# Altium PCB Motor19thnov2020.PcbDoc
Units mm, origin at the board's own origin, x right, y up, seen from the top; angles counter-clockwise.
Board outline 53.59 x 39.37 mm, 2 copper layers (Top Layer, Bottom Layer); 15 components, 15 nets, 58 pads, 2 vias.
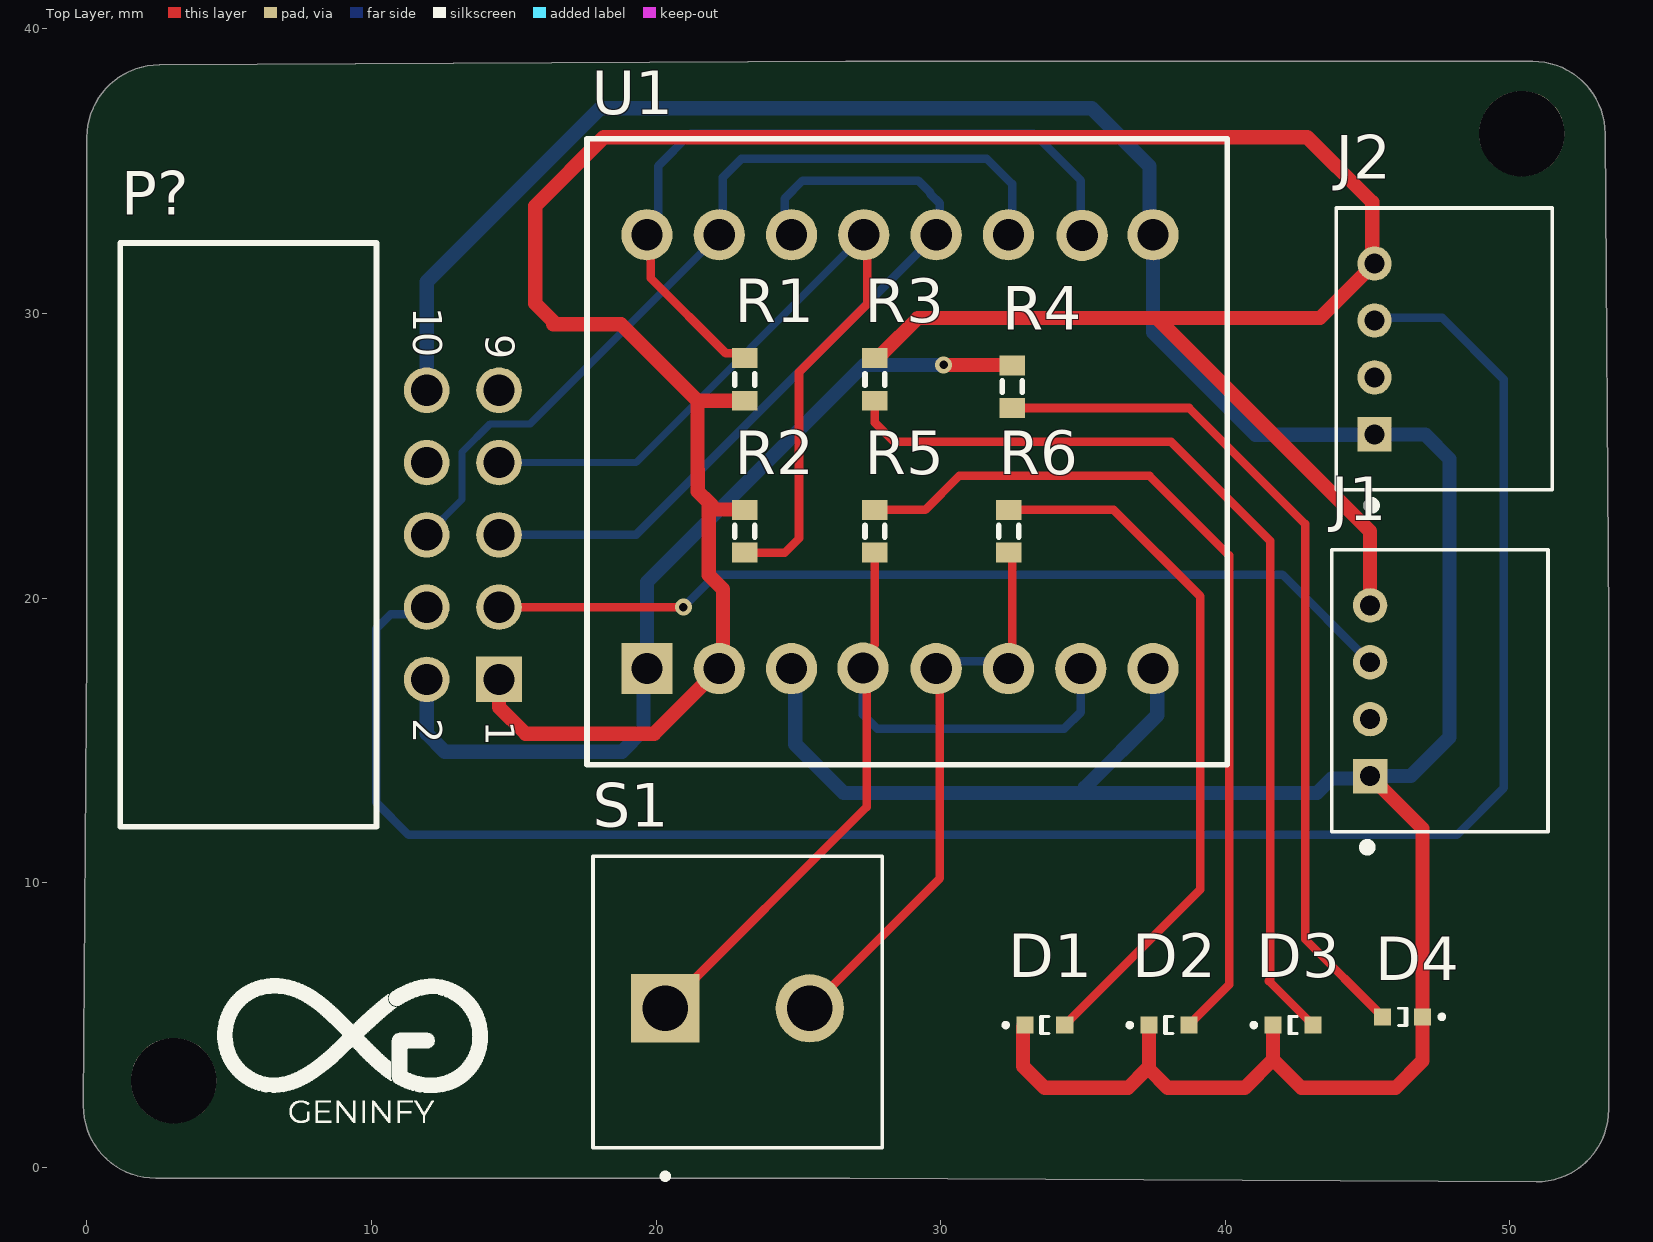
[diagram p0: Top Layer view]
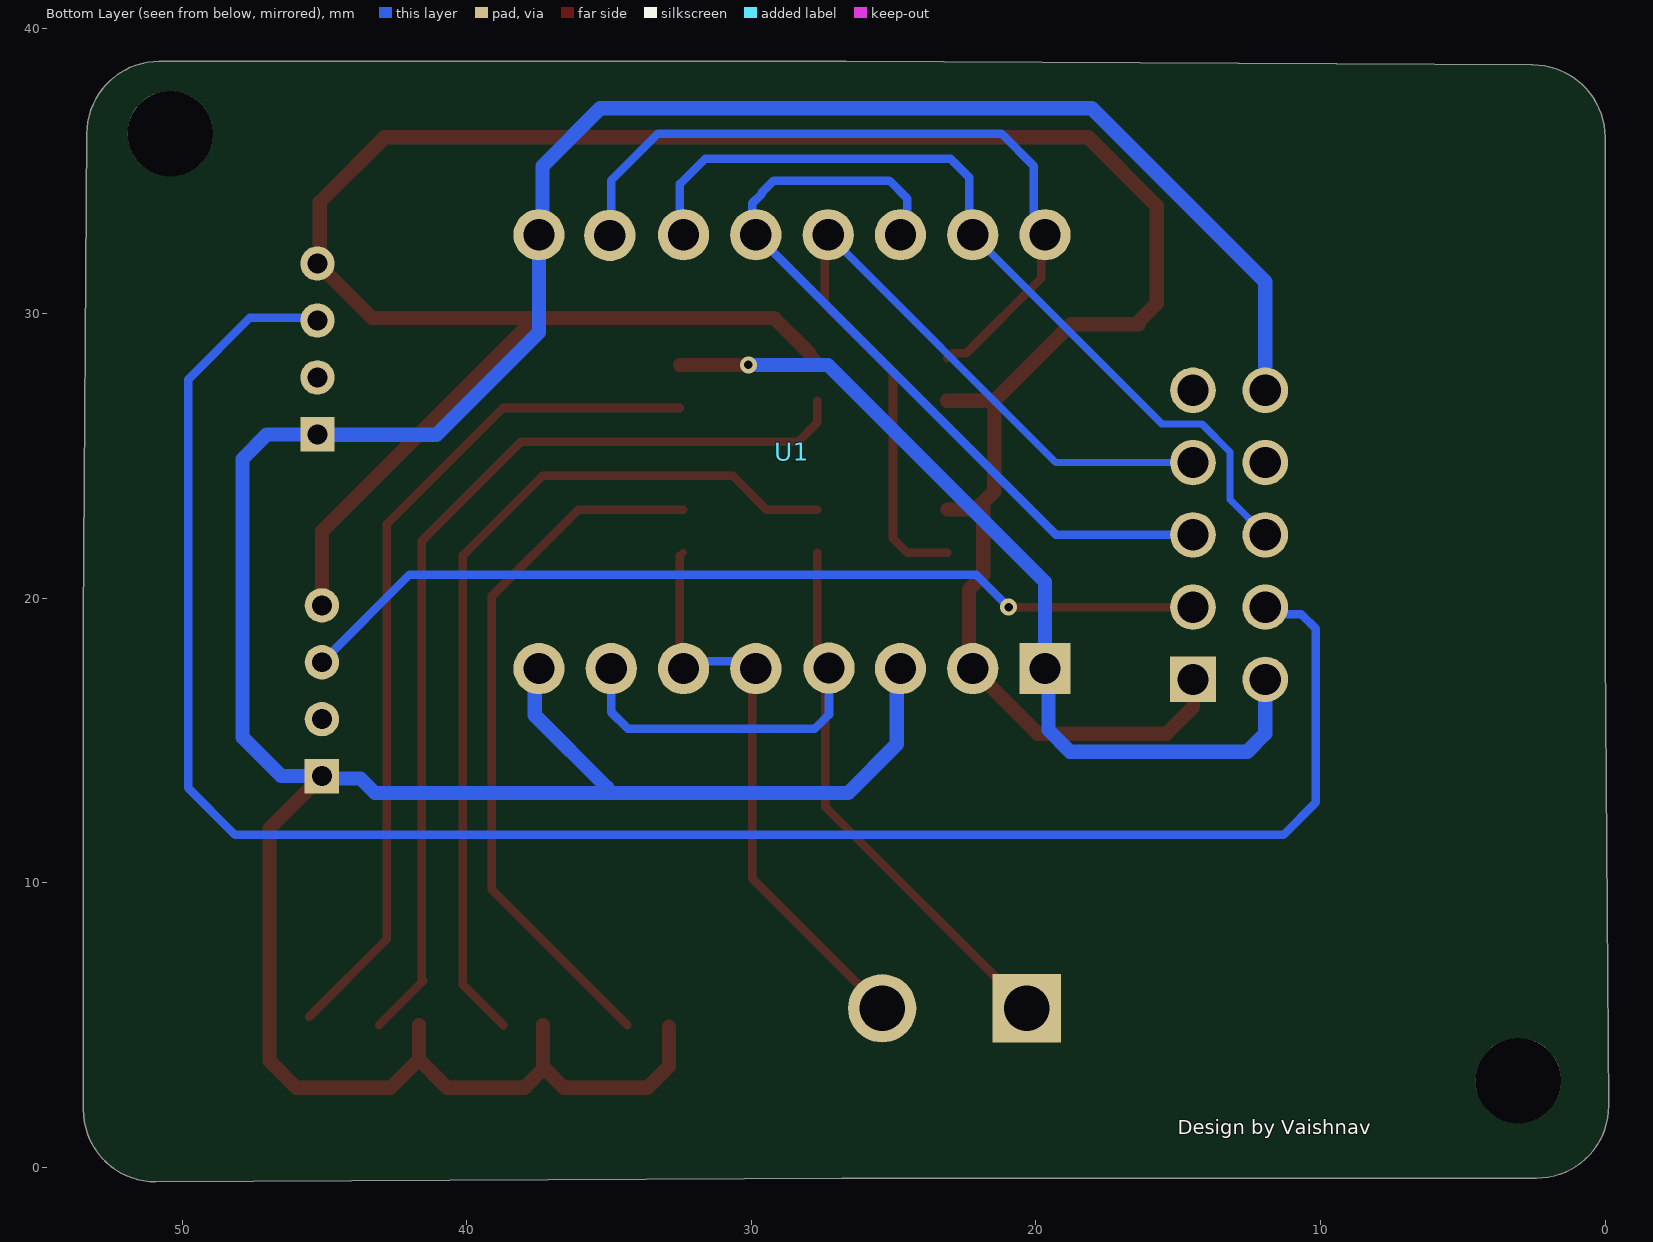
[diagram p1: Bottom Layer view, seen from below]

## Layer stack, top to bottom
Top Solder: solder mask 0.0102, Solder Resist, Dk 3.5
Top Layer: signal copper 0.0356
Dielectric 1: dielectric 0.32, FR-4, Dk 4.8
Bottom Layer: signal copper 0.0356
Bottom Solder: solder mask 0.0102, Solder Resist, Dk 3.5

## Board outline
50.8,38.862 cw(c50.8,36.322) 53.34,36.322 53.467,19.177 53.467,2.032 cw(c50.927,2.032) 50.927,-0.508 26.797,-0.381 2.413,-0.381 cw(c2.413,2.159) -0.127,2.159 0,18.158 0,36.195 cw(c2.54,36.195) 2.54,38.735 26.67,38.862

## Design rules (kind name [scope] priority, off if disabled: settings)
Clearance [All] p1: gap=0.254 ignorepadtopadclearanceinfootprint=FALSE except(0: Arc-Hole Track-Hole SMDPad-Hole THPad-Hole Via-Hole Fill-Hole Poly-Hole Region-Hole Text-Hole)
PolygonConnect [All] p1: connectstyle=Relief reliefconductorwidth=0.254 reliefentries=4 polygonreliefangle="90 Angle" airgapwidth=0.254
RoutingVias [All] p1: holewidth=0.711 width=1.27 viastyle="Through Hole" minholewidth=0.711 minwidth=1.27 maxholewidth=0.711 maxwidth=1.27
SolderMaskExpansion [All] p1: expansion=0.102 istentingtop=FALSE
Width [All] p1 off: maxlimit=0.254 minlimit=0.254 preferedwidth=0.254
30 further rules are at their usual default settings.

## Components (designator, comment, footprint, x,y, rotation, side; value= is the part's Value field where it differs from the comment)
D1 "Red, 2V" WL-SMSW_0603_Rectangular 33.655,5.212 r0 top
D2 "Red, 2V" WL-SMSW_0603_Rectangular 38.015,5.212 r0 top
D3 "Red, 2V" WL-SMSW_0603_Rectangular 42.376,5.212 r0 top
D4 "Red, 2V" WL-SMSW_0603_Rectangular 46.228,5.08 r180 top
J1 "S4B-PH-K-S(LF)(SN)" JST_S4B-PH-K-S(LF)(SN) 45.085,16.748 r90 top
J2 "S4B-PH-K-S(LF)(SN)" JST_S4B-PH-K-S(LF)(SN) 45.241,28.758 r90 top
P? "61201021721" 61201021721 5.673,22.225 r270 top
R1 "R1" J1-0603 23.114,27.686 r270 top value=10K
R2 "R2" J1-0603 23.114,22.352 r90 top value=10K
R3 "R3" J1-0603 27.686,27.686 r270 top value=10K
R4 "R4" J1-0603 32.512,27.432 r270 top value=10K
R5 "R5" J1-0603 27.686,22.352 r90 top value=10K
R6 "R6" J1-0603 32.385,22.352 r90 top value=10K
S1 "TB007-508-02BE" CUI_TB007-508-02BE 20.32,5.588 r0 top
U1 "Female Headers" TB6612FNG 28.567,25.146 r90 bottom

## Footprints (in the part's own frame and the unit in brackets; to place one, negate y for a bottom-side part, rotate by r counter-clockwise, add the part's x,y. Pads: shape width x height; smd on the part's side, far side on the other; paste and mask are expansions set on the pad)
61201021721 [mm] "10 pins, right angled, gold plating"
  rect 1.6x1.6 hole 1.1: 1(5.08,8.805)
  round 1.6 hole 1.1: 2(5.08,6.265) 3(2.54,8.805) 4(2.54,6.265) 5(0,8.805) 6(0,6.265) 7(-2.54,8.805) 8(-2.54,6.265) 9(-5.08,8.805) 10(-5.08,6.265)
  silkscreen extent -10.26,-4.5 10.26,4.5, body extent -10.18,-4.42 10.18,9.13, height 9.23
CUI_TB007-508-02BE [mm]
  rect 2.4x2.4 hole 1.6: 1(0,0)
  round 2.4 hole 1.6: 2(5.08,0)
  silkscreen extent -2.54,-6 7.62,5.35
J1-0603 [mm] "Chip Resistor, Body 1.6x0.8mm, IPC High Density"
  rect 0.7x0.9 smd: 1(-0.75,0) 2(0.75,0)
  silkscreen extent -0.2,-0.35 0.2,0.35, body extent -0.85,-0.48 0.85,0.48, height 0.9
JST_S4B-PH-K-S(LF)(SN) [mm]
  rect 1.208x1.208 hole 0.7: 1(-3,0)
  round 1.208 hole 0.7: 2(-1,0) 3(1,0) 4(3,0)
  silkscreen extent -5.64,-6.25 4.95,1.35
TB6612FNG [mm]
  rect 1.8x1.8 hole 1.1: 1(-7.62,-8.89)
  round 1.8 hole 1.1: 2(-7.62,-6.35) 3(-7.62,-3.81) 4(-7.6,-1.3) 5(-7.62,1.27) 6(-7.62,3.81) 7(-7.62,6.35) 8(-7.62,8.89) 9(7.62,8.89) 10(7.6,6.4) 11(7.62,3.81) 12(7.62,1.27) 13(7.62,-1.27) 14(7.62,-3.81) 15(7.62,-6.35) 16(7.62,-8.89)
  body extent -10.35,-10.29 10.55,10.69, height 13.55
WL-SMSW_0603_Rectangular [mm] "SMT Mono-color Side view Waterclear, body 1.6x0.98mm"
  rect 0.6x0.6 smd: 1(-0.7,-0.21) 2(0.7,-0.21)
  silkscreen extent -1.45,-0.51 0.15,0.09, body extent -0.8,-0.5 0.8,0.48, height 0.8

## Part data
D1 D2 D3 D4: library part 155060RS75300, "WL-SMSW SMT Mono-color Side View Waterclear, size 0603, Red, 2V, 140deg", Emitting Color=Red, Forward Voltage typ.=2V, Manufacturer="Wurth Elektronik", Operating Temperature="-40 to +85degC", Chip Technology=AlInGaP, ComponentLink1Description=Manufacturer, ComponentLink1URL=http://www.we-online.de, ComponentLink2Description=Datasheet, ComponentLink2URL=https://www.we-online.com/catalog/datasheet/155060RS75300.pdf, Dominant Wavelength typ.=625nm, Luminous Intensity typ.=150mcd, Manufacturer Part Number=155060RS75300, Mounting Technology=SMT, Packaging="Tape and Reel", Peak Wavelength typ.=630nm, Published Date="October 2020", Size=0603, Viewing Angle=140deg
J1 J2: "Connector Header Through Hole, Right Angle 4 position 0.079 _2.00mm_", Package=None, Availability=Unavailable, MF="JST Sales", MP=S4B-PH-K-S_LF__SN_, Price=None, SnapEDA_Link=https://www.snapeda.com/parts/S4B-PH-K-S%28LF%29%28SN%29/JST%20Sales%20America%20Inc./view-part/591324/?ref=snap
P?: library part CMP-1502-00021-1, "Male Box Header WR-BHD, THT, Angled, pitch 2.54 mm, 10 pins", Contact Resistance=20mOhm, Manufacturer="Wurth Elektronik", Operating Temperature=-40to125degC, Withstanding Voltage=500VAC, Working Voltage=250VAC, Datasheet URL=https://katalog.we-online.de/em/datasheet/6120xx21721.pdf, Gender=Male, Manufacturer URL=http://www.we-online.de, Mounting Technology=THT, Orientation=Angled, Package Reference=61201021721, Packaging=Tray, Part Number=61201021721, Pin Number=10, Pitch=2.54mm, Published Date=August2018, Publisher=WurthElektronik
R1 R2 R3 R4 R5 R6: library part Res3, "Resistor", LatestRevisionDate=29-May-2009, LatestRevisionNote="IPC-7351 Footprint Added.", PackageDescription="Chip Resistor", PackageReference=J1-0603, Published=8-Jun-2000, Publisher="Altium Limited"
S1: "2~24 Poles, Screw Type, Horizontal, 5.08 Pitch, 24~12 _AWG_, Terminal Block Connector", Package=None, Availability=Unavailable, MF="CUI Devices", MP=TB007-508-02BE, Price=None, SnapEDA_Link=https://www.snapeda.com/parts/TB007-508-02BE/CUI%20Devices/view-part/3591212/?ref=snap
U1: library part "TB6612FNG Female", "Motor Driver"

## Free pads (board coordinates)
  round 3 hole 3 unplated: ""(3.048,3.048) ""(50.419,36.322)

## Via types
v1: diameter 0.6, hole 0.3, Top Layer to Bottom Layer, 2 vias

## Nets (pads, with @x,y where several pads share a name; then routed paths per layer and width w, separated by ;. In a path a pad name is that pad's centre, name@x,y a point inside that pad or via, vN(x,y) a via of type N, cw(c..) or ccw(c..) an arc to the next point about the centre after c; other vN are vias at no path point)
GND: D1.1 D2.1 D3.1 D4.1 J1.1 J2.1 P?.10 U1.3 U1.8 U1.9 | length 132.5
  Top Layer w0.254: D1.1@32.893,4.94 D1.1
  Top Layer w0.5: D1.1@32.893,4.94 32.893,3.556 33.655,2.794 36.576,2.794 37.234,3.452 37.315,3.452 ; D2.1 37.315,3.452 ; D3.1 41.676,3.79 ; J1.1 46.928,11.905 46.928,3.748 45.974,2.794 42.672,2.794 41.676,3.79 ; 37.315,3.452 37.973,2.794 40.679,2.794 41.676,3.79
  Bottom Layer w0.5: P?.10 11.938,31.115 18.034,37.211 35.306,37.211 37.338,35.179 37.338,32.885 U1.9 37.457,29.345 41.058,25.744 45.227,25.744 45.231,25.748 47.023,25.748 47.879,24.892 47.879,15.113 46.514,13.748 J1.1 45.001,13.664 43.731,13.664 43.224,13.157 ; U1.3@24.884,17.78 24.884,14.867 26.594,13.157 43.224,13.157 ; 35.052,13.157 43.224,13.157 ; 35.052,13.335 37.605,15.888 37.605,17.378 U1.8
"Input 1": P?.5 U1.12 U1.14 | length 28
  Bottom Layer w0.3: P?.5 19.296,22.225 U1.12 ; U1.14 24.511,33.012 24.511,34.036 25.146,34.671 29.21,34.671 29.632,34.249 29.632,34.206 29.964,33.874 U1.12@29.964,33.02
"Input 2": P?.6 U1.11 U1.15 | length 29.7
  Bottom Layer w0.254: P?.6 13.181,23.468 13.181,25.138 14.167,26.124 15.575,26.124 U1.15
  Bottom Layer w0.3: U1.15@22.344,33.02 22.344,34.79 22.987,35.433 31.623,35.433 32.504,34.552 U1.11@32.504,33.02
NetD1_2: D1.2 R6.2 | length 25
  Top Layer w0.3: R6.2 36.08,23.102 39.116,20.066 39.116,9.763 D1.2
NetD2_2: D2.2 R5.2 | length 31.2
  Top Layer w0.3: R5.2 29.452,23.102 30.645,24.295 37.338,24.295 40.132,21.501 40.132,6.418 D2.2
NetD3_2: D3.2 R3.2 | length 34
  Top Layer w0.3: R3.2 27.686,26.162 28.359,25.489 38.1,25.489 41.571,22.017 41.571,6.548 ; 41.529,6.548 D3.2
NetD4_2: D4.2 R4.2 | length 30.4
  Top Layer w0.3: R4.2 38.723,26.682 42.799,22.606 42.799,8.019 D4.2
NetR1_1: R1.1 U1.10 U1.16 | length 26.3
  Top Layer w0.3: U1.16@19.804,33.02 19.804,31.25 22.448,28.606 22.944,28.606 R1.1
  Bottom Layer w0.3: U1.16@19.804,33.02 20.066,33.282 20.066,35.179 21.209,36.322 33.274,36.322 34.925,34.671 34.925,33.169 U1.10@35.094,33
output1: R5.1 S1.1 U1.4 U1.7 | length 30.4
  Top Layer w0.3: S1.1 27.394,12.662 U1.4@27.394,17.546 ; U1.4 27.267,17.952 27.686,18.371 R5.1
  Bottom Layer w0.3: U1.4 27.267,15.913 27.762,15.418 34.341,15.418 34.917,15.994 U1.7
output2: R6.1 S1.2 U1.5 U1.6 | length 20.5
  Top Layer w0.254: U1.5@29.964,17.772 29.972,17.78 U1.5@29.964,17.78 ; R6.1 R6.1@32.504,21.483
  Top Layer w0.3: S1.2 29.964,10.152 U1.5@29.964,17.772 ; U1.6@32.504,17.78 R6.1@32.504,21.483
  Bottom Layer w0.3: U1.5@29.964,17.78 U1.6@32.504,17.78
signal1: J1.3 P?.3 | length 32.4
  Top Layer w0.3: P?.3 v1(20.955,19.685)
  Bottom Layer w0.3: v1(20.955,19.685) 22.098,20.828 42.005,20.828 J1.3
signal2: J2.3 P?.4 | length 68.8
  Bottom Layer w0.3: P?.4 11.689,19.436 11.118,19.436 11.112,19.431 10.668,19.431 10.16,18.923 10.16,12.827 11.303,11.684 48.133,11.684 49.784,13.335 49.784,27.686 47.625,29.845 45.328,29.845 J2.3
STBY: P?.7 R2.1 U1.13 | length 30.3
  Top Layer w0.254: R2.1 R2.1@23.214,21.602
  Top Layer w0.3: R2.1 24.523,21.602 25.019,22.098 25.019,27.94 27.424,30.345 U1.13@27.424,33.02
  Bottom Layer w0.254: P?.7 19.296,24.765 U1.13
VCC: J1.4 J2.4 P?.1 R1.2 R2.2 R3.1 U1.2 | length 99.3
  Top Layer w0.254: 21.451,24.523 21.463,24.511 ; R2.2@23.102,23.114 R2.2 ; R3.1 R3.1@27.909,28.659
  Top Layer w0.5: P?.1@14.927,16.696 P?.1 14.478,16.168 15.406,15.24 19.931,15.24 U1.2 ; 16.383,29.622 18.765,29.622 21.451,26.936 ; 16.383,29.718 15.748,30.353 15.748,33.782 18.161,36.195 42.878,36.195 45.01,34.063 45.157,33.916 45.157,31.674 43.328,29.845 37.592,29.845 ; 21.451,24.523 21.451,26.936 ; 21.463,24.511 21.463,23.749 21.844,23.368 ; U1.2@22.344,17.78 22.344,20.316 21.844,20.816 21.844,23.368 ; R2.2@23.102,23.114 22.098,23.114 21.844,23.368 ; R1.2 21.451,26.936 ; R3.1@27.959,28.609 29.195,29.845 37.592,29.845 ; J1.4 45.085,22.352 37.592,29.845
VM: P?.2 R4.1 U1.1 | length 31.4
  Top Layer w0.254: v1(30.099,28.194) v1@30.105,28.188 ; R4.1@32.506,28.188 R4.1
  Top Layer w0.5: v1@30.105,28.188 R4.1@32.506,28.188
  Bottom Layer w0.254: U1.1@19.558,17.407 U1.1
  Bottom Layer w0.5: P?.2 11.938,15.24 12.573,14.605 18.796,14.605 19.558,15.367 U1.1@19.558,17.407 ; U1.1 19.677,20.566 27.305,28.194 v1(30.099,28.194)
pads on no net: J1.2 J2.2 P?.8 P?.9

## Silkscreen, mask and mechanical layers (free items; w line width, h text height)
Top Overlay:
  drawing of 9 lines, arcs and shapes, not listed
Bottom Overlay:
  text "Design by Vaishnav" at 15.013,1.156 h0.5
Mechanical 13:
  circle w0.254: c3.048,3.048 r1.656
  circle w0.254: c50.419,36.322 r1.656

## Text inside footprints (layer, text, board x,y; h text height)
P?: Top Overlay "9" at 14.013,29.265 h1.02 r270; Top Overlay "10" at 11.473,30.225 h1.02 r270; Top Overlay "2" at 11.473,15.785 h1.02 r270; Top Overlay "1" at 14.013,15.685 h1.02 r270